# EAGLE board CMM.PCB.v1.0 (EAGLE 9.6.2)
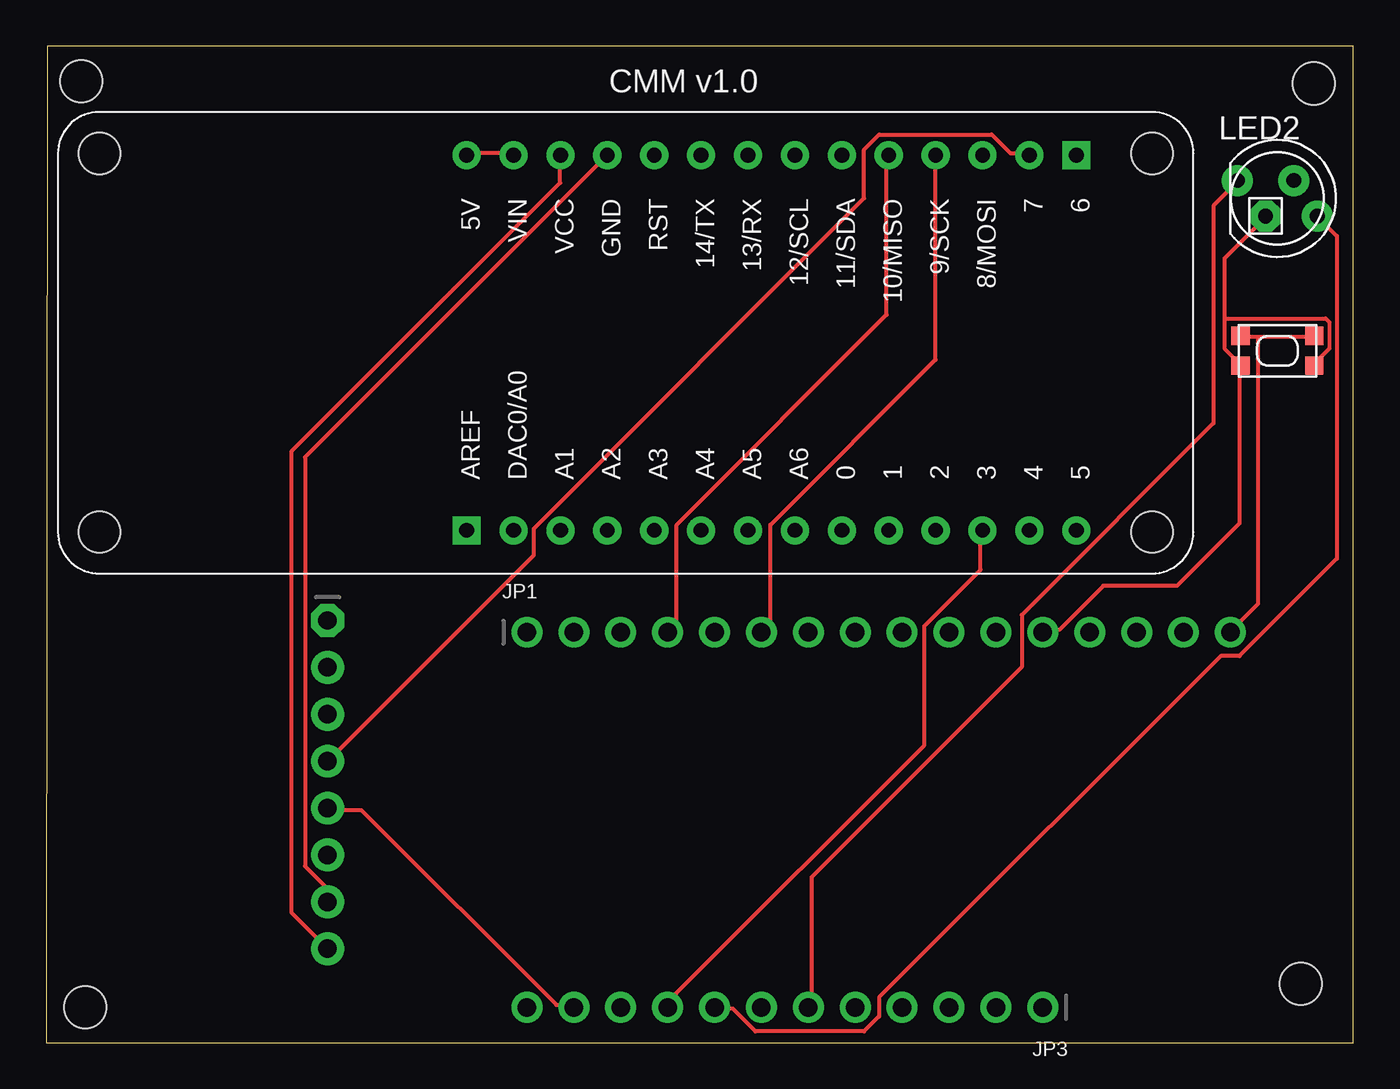
[diagram p0: board, top side]
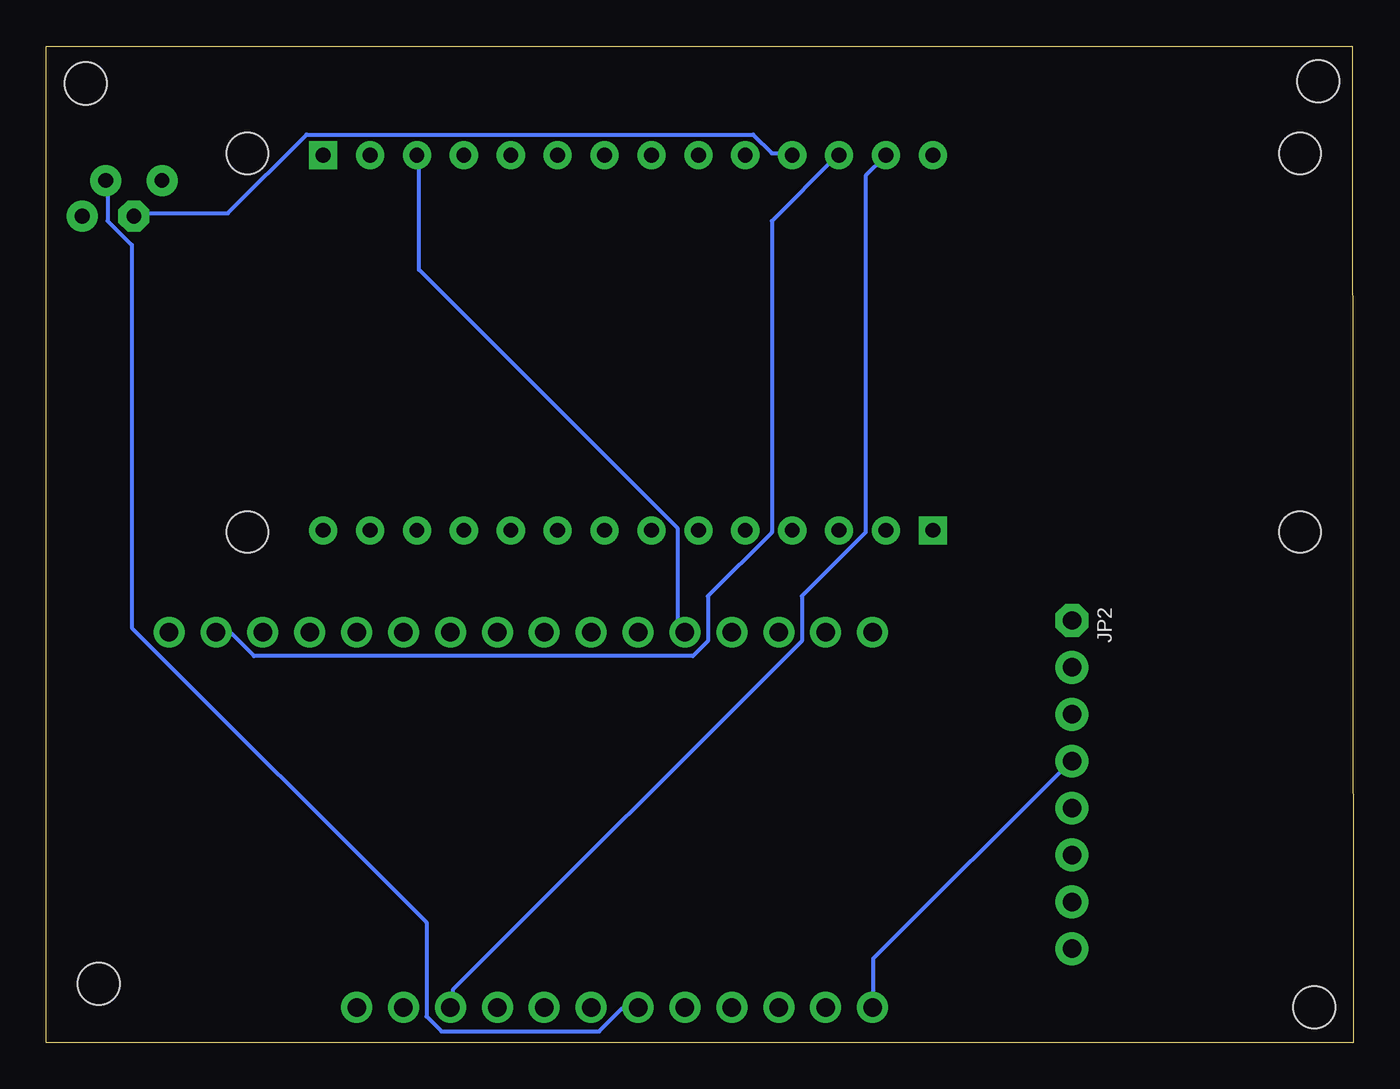
[diagram p1: board, bottom side, seen from below]

Size 70.79 x 53.97 mm. Coordinates in mm from the lower left corner, seen from the top.
Outline: 0,0 70.79,0 70.79,53.97 0.06,53.97 0,0
Copper layers (1*16): Top 0.035mm / dielectric 1.5mm / Bottom 0.035mm
Design rules "default *": minimum track width 8mil, minimum drill 15.5mil, track to track 8mil, track to pad 8mil, pad to pad 8mil, via to via 8mil, smd to smd 8mil, copper to edge 10mil, drill to drill 8mil, minimum pad ring 10mil, minimum via ring 8mil, stop-mask expansion 4mil, vias tented up to drill 20mil, thermal gap 10mil
Holes 2.29 mm at 2.11,1.91 67.94,3.17 1.91,52.07 68.64,51.94

## Footprints (pad centres in the part's own frame; a part is rotated, then mirrored left to right if it is on the bottom)
1X16_ROUND = drill 1 pad 1.676: 1 -19.05,0; 2 -16.51,0; 3 -13.97,0; 4 -11.43,0; 5 -8.89,0; 6 -6.35,0; 7 -3.81,0; 8 -1.27,0; 9 1.27,0; 10 3.81,0; 11 6.35,0; 12 8.89,0; 13 11.43,0; 14 13.97,0; 15 16.51,0; 16 19.05,0
1X08_ROUND_70 = drill 1 pad 1.778 octagon: 1 -8.89,0 | drill 1 pad 1.778: 2 -6.35,0; 3 -3.81,0; 4 -1.27,0; 5 1.27,0; 6 3.81,0; 7 6.35,0; 8 8.89,0
1X12_ROUND = drill 1 pad 1.676: 1 -13.97,0; 2 -11.43,0; 3 -8.89,0; 4 -6.35,0; 5 -3.81,0; 6 -1.27,0; 7 1.27,0; 8 3.81,0; 9 6.35,0; 10 8.89,0; 11 11.43,0; 12 13.97,0
LED5MMRGB = drill 0.8 pad 1.676: 1 -2.159,0.968; 3 0.889,0.968; 4 2.159,-0.968 | drill 0.8 pad 1.676 octagon: 2 -0.635,-0.968
ARDUINO-UTILITY_MKRBOARD = drill 0.8 pad 1.524: 0 42.455,2.34; 1 44.995,2.34; 2 47.535,2.34; 3 50.075,2.34; 4 52.615,2.34; 5 55.155,2.34; 5V 22.135,22.66; 7 52.615,22.66; 8 50.075,22.66; 9 47.535,22.66; 10 44.995,22.66; 11 42.455,22.66; 12 39.915,22.66; 13 37.375,22.66; 14 34.835,22.66; A0 24.675,2.34; A1 27.215,2.34; A2 29.755,2.34; A3 32.295,2.34; A4 34.835,2.34; A5 37.375,2.34; A6 39.915,2.34; GND 29.755,22.66; RST 32.295,22.66; VCC 27.215,22.66; VIN 24.675,22.66 | drill 0.8 pad 1.524 square: 6 55.155,22.66; AREF 22.135,2.34 | hole 2.25: 59.25,2.25; 59.25,22.75; 2.25,2.25; 2.25,22.75
KMR2 = smd 1 x 1: 1 2,0.8; 2 2,-0.8; 3 -2,0.8; 4 -2,-0.8

## Placement (x,y rotation side)
JP1  [1X16_ROUND]  45.09,22.23 0 top
JP2  [1X08_ROUND_70]  15.24,13.97 270 top
JP3  [1X12_ROUND]  40.01,1.91 180 top
LED2  RGBLED_CA-5MM  [LED5MMRGB]  66.67,45.72 0 top
MKR1  -  [ARDUINO-UTILITY_MKRBOARD]  0.64,25.4 0 top
SW1  SPST_TACT-KMR2  [KMR2]  66.67,37.47 0 top

## Library data of the parts
JP1-JP3 = microbuilder
LED2 SW1 = adafruit
MKR1 = adafruit; CODE-ARDUINO: A5272 A5273; DATASHEET: -; DISTRIBUTOR-LINK: -; DISTRIBUTOR-PN: -; MANUFACTURER: -; MANUFACTURER-PN: 21TW331 21TW332

## Nets
GND: JP1.12 JP2.7 LED2.2 MKR1.GND SW1.2 SW1.4
N$1: JP3.9 MKR1.3
N$2: JP2.4 JP3.12 MKR1.7
N$3: JP1.5 MKR1.8
N$4: JP1.6 MKR1.9
N$5: JP1.4 MKR1.10
N$6: JP1.15 JP2.8 MKR1.VCC
N$7: JP3.3 MKR1.5V MKR1.VIN
N$8: JP3.6 LED2.1
N$9: JP2.5 JP3.11
N$10: JP3.7 LED2.3
N$11: JP3.8 LED2.4
RST: JP1.16 SW1.1 SW1.3

## Tracks (layer width: path | path; a pad name or v marks a point on that pad's centre or on a via)
GND
  Top 0.203: 63.8,39.22 63.8,42.47 66.04,44.7 LED2.2 | 63.8,39.22 63.8,37.59 64.62,36.78 SW1.4 64.62,36.58 64.62,28.12 61.24,24.74 57.25,24.74 54.86,22.35 54.05,22.35 JP1.12 | 63.8,39.22 69.29,39.22 69.49,39.01 69.49,37.59 68.68,36.78 SW1.2 | JP2.7 15.24,8.33 14.02,9.55 14.02,31.7 30.28,47.95 MKR1.GND
  Bottom 0.203: MKR1.GND 30.48,48.16 31.5,48.16 32.51,49.17 56.69,49.17 60.96,44.91 66.04,44.91 LED2.2
N$1
  Top 0.203: MKR1.3 50.6,27.64 50.6,25.6 47.55,22.55 47.55,16.1 34.11,2.67 JP3.9
N$2
  Top 0.203: JP2.4 26.42,26.42 26.42,27.84 44.3,45.72 44.3,48.36 45.11,49.17 51.21,49.17 52.22,48.16 53.24,48.16 MKR1.7
  Bottom 0.203: JP2.4 15.3,15.24 26.01,4.53 26.01,2.03 JP3.12
N$3
  Bottom 0.203: MKR1.8 50.6,47.95 50.6,41.86 36.58,27.84 36.58,22.55 36.37,22.35 JP1.5
N$4
  Top 0.203: MKR1.9 48.16,47.95 48.16,36.98 39.22,28.04 39.22,22.76 38.81,22.35 JP1.6
N$5
  Top 0.203: MKR1.10 45.52,47.95 45.52,39.42 34.14,28.04 34.14,22.76 33.73,22.35 JP1.4
N$6
  Top 0.203: JP2.8 13.3,7.02 13.3,32.03 27.84,46.57 27.84,47.95 MKR1.VCC
  Bottom 0.203: JP1.15 61.57,22.15 60.76,22.15 59.54,20.93 35.76,20.93 34.95,21.74 34.95,24.18 31.5,27.64 31.5,44.5 28.04,47.95 MKR1.VCC
N$7
  Top 0.203: MKR1.5V 22.96,48.16 25.2,48.16 MKR1.VIN
  Bottom 0.203: JP3.3 48.77,2.03 48.77,2.85 29.87,21.74 29.87,24.18 26.42,27.64 26.42,46.94 25.4,47.95 MKR1.VIN
N$8
  Top 0.203: JP3.6 41.45,2.03 41.45,8.95 52.83,20.33 52.83,23.16 63.21,33.54 63.21,45.33 64.41,46.53 LED2.1
N$9
  Top 0.203: JP3.11 28.45,2.03 27.64,2.03 17.07,12.6 15.24,12.6 JP2.5
N$10
  Bottom 0.203: JP3.7 38.81,1.83 39.62,1.83 40.84,0.61 49.38,0.61 50.19,1.42 50.19,6.5 66.15,22.47 66.15,43.19 67.46,44.5 67.46,46.53 LED2.3
N$11
  Top 0.203: JP3.8 36.37,1.83 37.19,1.83 38.41,0.61 44.3,0.61 45.11,1.42 45.11,2.44 63.6,20.93 64.62,20.93 69.9,26.21 69.9,43.69 68.89,44.7 LED2.4
RST
  Top 0.203: 65.63,38.2 68.48,38.2 SW1.1 | 65.63,38.2 64.82,38.2 SW1.3 | 65.63,38.2 65.63,23.77 64.21,22.35 JP1.16

## Text on the board
tNames: CMM v1.0